# Altium PCB 23970修改.PcbDoc (part 2 of 2)
Units mm, origin at the board's own origin, x right, y up, seen from the top; angles counter-clockwise.
Board outline 62.06 x 76 mm, 2 copper layers (Top Layer, Bottom Layer); 25 components, 55 nets, 531 pads, 222 vias.
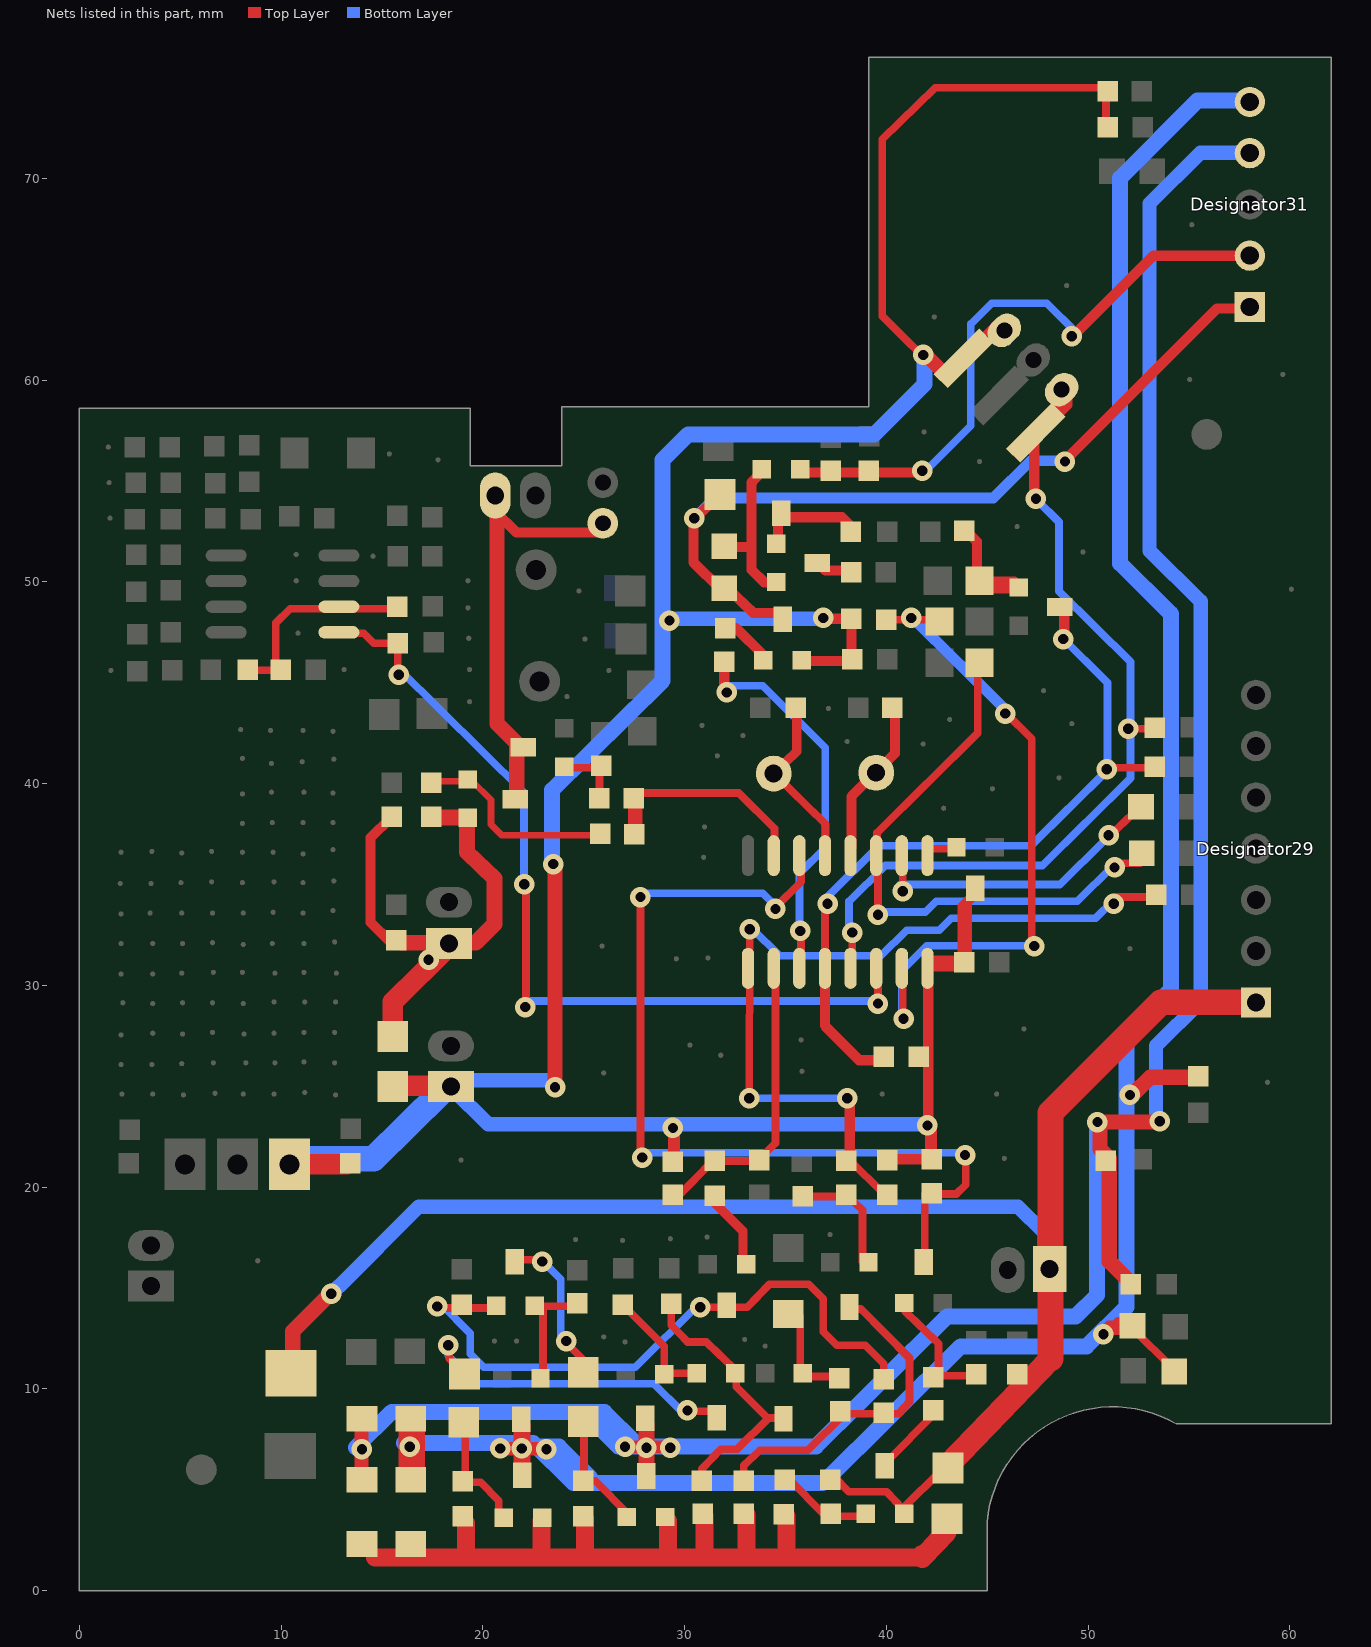
[diagram p2: the nets of this part, all layers, seen from the top]

## Via types
v1: diameter 1.016, hole 0.508, Top Layer to Bottom Layer, 218 vias
v2: diameter 3, hole 3, Top Layer to Bottom Layer, 4 vias

## Nets (pads, with @x,y where several pads share a name; then routed paths per layer and width w, separated by ;. In a path a pad name is that pad's centre, name@x,y a point inside that pad or via, vN(x,y) a via of type N, cw(c..) or ccw(c..) an arc to the next point about the centre after c; other vN are vias at no path point) (continued)
NewNet8: ?.77 pad.136 pad.164 pad.165 | length 10.7
  Top Layer w0.381: pad.164@8.086,45.612 9.948,45.612 9.737,45.612 9.737,47.959 10.456,48.672 pad.136@15.748,48.672
NewNet9: ?.3 ?.78 pad.0@15.833,45.403 pad.0@22.056,35.008 pad.0@22.098,28.93 pad.0@39.582,29.098 pad.133 | length 42.1
  Top Layer w0.381: ?.78@13.039,47.456 14.097,47.456 14.605,46.953 pad.133@15.79,46.953 pad.0@15.79,45.486 ; pad.0@22.14,29.014 v1@22.14,34.84 ; v1(39.582,29.098) ?.3@39.582,30.607
  Bottom Layer w0.381: v1@15.843,45.686 22.045,39.545 pad.0@22.045,35.092 ; v1@22.31,29.224 v1@39.497,29.224
  other v1: 22.098,28.93 22.056,35.008 15.833,45.403
NewNet10: ?.68 pad.198 pad.258 | length 6.7
  Top Layer w0.508: pad.198@43.73,52.444 44.027,52.444 44.492,51.983 44.492,50.013 44.916,50.013 46.355,50.013 46.355,49.678 pad.258@44.746,49.678
NewNet11: ?.5 ?.70 pad.0@37.084,34.044 pad.0@48.768,47.163 pad.0@50.927,40.708 pad.88 pad.100 | length 37.2
  Top Layer w0.381: ?.5@36.957,31.403 v1@36.957,34.086 ; pad.0@50.885,40.792 pad.88@53.298,40.792
  Top Layer w0.508: ?.5@36.957,30.607 36.957,28.008 38.65,26.29 pad.100@39.836,26.29 ; pad.0@48.81,47.247 ?.70@48.81,48.714
  Bottom Layer w0.381: pad.0@37.01,34.033 37.01,34.327 39.635,36.926 47.17,36.926 50.959,40.677 50.959,45.004 v1@48.609,47.331
  other v1: 37.084,34.044 50.927,40.708 48.768,47.163
NewNet12: ?.65 pad.208 | length 2.5
  Top Layer w0.508: pad.208@31.962,47.708 32.554,47.708 ?.65@33.909,46.367
NewNet13: ?.1 ?.52 ?.66 pad.0@23.58,24.949 pad.0@23.495,36.014 pad.0@29.252,48.085 pad.0@29.422,22.937 pad.0@36.872,48.211 pad.0@41.825,61.246 pad.0@42.037,23.062 pad.83 pad.84 pad.97 pad.99 pad.101 pad.111 pad.126 pad.183 pad.190 pad.191 pad.241 pad.263 pad.285 pad.291 pad.296 | length 165.3
  Top Layer w0.381: pad.111@29.379,21.218 29.379,22.853 29.591,22.853 pad.111@29.591,21.512 ; v1@41.868,61.54 43.011,60.408 42.799,60.198 39.793,63.174 39.793,71.934 42.418,74.491 50.885,74.491 pad.83@50.885,72.353
  Top Layer w0.508: ?.66@35.983,46.073 38.269,46.073 pad.191@38.269,48.169 pad.0@36.872,48.169 ; pad.101@40.005,21.386 pad.97@42.164,21.386 ; v1@42.079,23.188 42.079,31.236 43.476,31.236 43.476,30.942 ?.1@42.164,30.942 ; pad.97@42.164,21.595 42.164,23.02 42.249,23.02 pad.97@42.249,21.428 ; pad.263@43.942,61.12 45.635,62.797 45.762,62.671 45.424,62.671 pad.263@44.45,61.707 ; 43.984,33.918 43.984,31.11 43.773,31.11 43.773,33.918 ?.52@44.281,34.421
  Top Layer w0.762: pad.0@23.58,25.074 v1@23.58,35.804
  Top Layer w1.016: pad.291@10.245,21.134 pad.126@13.25,21.134 ; pad.241@15.706,25.032 pad.285@18.457,25.032
  Bottom Layer w0.711: pad.285@18.489,24.875 20.267,23.115 v1@41.889,23.115 ; pad.285@18.881,25.305 v1@23.537,25.305 ; v1@29.146,48.179 pad.0@36.851,48.179
  Bottom Layer w0.787: pad.0@23.431,35.993 23.431,39.681 28.914,45.109 28.914,56.049 30.184,57.306 39.399,57.306 41.89,59.797 pad.0@41.89,61.182
  Bottom Layer w1.27: pad.291@10.456,21.407 14.584,21.407 pad.285@17.949,24.739
  other v1: 29.422,22.937 42.037,23.062 23.58,24.949 23.495,36.014 29.252,48.085 36.872,48.211 41.825,61.246
NewNet14: ?.67 Designator31.1 pad.0@30.48,53.157 pad.0@48.853,55.965 pad.222 pad.247 | length 40.5
  Top Layer w0.508: pad.247@31.327,53.911 30.438,53.073 30.438,50.977 31.792,49.636 32.173,49.636 33.401,48.462 ?.67@34.84,48.462 ; pad.0@48.895,56.049 56.398,63.551 Designator31.1@58.013,63.551
  Bottom Layer w0.533: pad.0@30.554,53.23 31.496,54.163 45.297,54.163 47.159,56.007 pad.0@48.958,56.007
  other v1: 30.48,53.157 48.853,55.965
NewNet15: ?.62 pad.203 pad.209 | length 3.2
  Top Layer w0.381: ?.62@24.045,40.792 25.781,40.792 pad.209@25.781,39.325
NewNet16: ?.55 ?.64 pad.290 pad.297 | length 20.6
  Top Layer w0.508: pad.290@20.574,53.534 21.675,52.444 25.569,52.444 pad.297@25.993,52.863
  Top Layer w0.762: pad.290@20.701,53.66 20.701,42.972 21.675,42.008 ?.55@21.675,39.535
NewNet17: ?.58 ?.59 pad.195 | length 5
  Top Layer w0.508: ?.59@34.629,52.067 34.629,53.199 37.804,53.199 pad.195@38.312,52.696
NewNet18: ?.57 ?.60 pad.221 | length 7.7
  Top Layer w0.508: pad.221@32.004,51.732 33.274,51.732 ; ?.57@33.782,55.42 33.316,54.917 33.316,50.6 33.951,49.971 ?.60@34.459,49.971
NewNet19: ?.61 pad.193 | length 1.6
  Top Layer w0.508: ?.61@36.788,50.768 36.999,50.558 pad.193@38.312,50.558
NewNet20: ?.56 Designator31.2 pad.0@41.783,55.504 pad.0@49.191,62.168 pad.199 pad.202 | length 30.6
  Top Layer w0.508: ?.56@35.772,55.42 pad.0@41.825,55.42 ; v1@49.361,62.294 53.234,66.167 Designator31.2@58.013,66.167
  Bottom Layer w0.381: v1@42.069,55.64 44.185,57.736 44.185,62.776 45.233,63.813 47.942,63.813 v1@49.424,62.346
  other v1: 41.783,55.504 49.191,62.168
NewNet21: ?.53 pad.130 pad.210 | length 9.7
  Top Layer w0.33: pad.130@17.526,40.121 19.473,40.121 20.405,39.199 20.405,37.984 20.955,37.439 pad.210@25.442,37.439
NewNet22: ?.54 pad.0@17.314,31.278 pad.127 pad.129 pad.132 pad.242 pad.286 | length 25.5
  Top Layer w0.508: pad.132@15.452,38.319 14.436,37.313 14.436,33.122 15.409,32.158 pad.127@15.833,32.158
  Top Layer w0.787: pad.127@15.96,32.116 19.643,32.116 20.574,33.038 20.574,35.301 19.219,36.601 19.219,38.319 pad.129@17.441,38.319
  Top Layer w1.016: pad.242@15.536,27.631 15.536,29.182 pad.286@18.33,31.948
  other v1: 17.314,31.278
NewNet23: ?.16 ?.51 | length 1.4
  Top Layer w0.381: ?.16@42.164,36.768 ?.51@43.519,36.768
NewNet24: ?.47 pad.177 pad.249 | length 4.7
  Top Layer w0.381: pad.249@35.729,13.59 35.729,10.698 35.814,10.614 pad.177@37.55,10.614
NewNet25: ?.44 ?.49 pad.114 pad.167 | length 13.4
  Top Layer w0.381: pad.114@29.337,14.009 29.337,13.171 30.141,12.332 31.073,12.332 32.554,10.907 32.554,10.111 34.078,8.602 ; pad.167@30.861,5.542 30.861,6.045 31.792,7.009 32.597,7.009 34.163,8.56 ?.49@34.798,8.56
NewNet26: ?.41 ?.45 pad.116 | length 5.8
  Top Layer w0.381: pad.116@27.051,14.051 28.998,12.123 28.998,10.782 ?.45@30.692,10.782
NewNet27: ?.46 pad.0@18.288,12.165 pad.0@30.141,8.937 pad.232 | length 16.3
  Top Layer w0.381: pad.0@18.33,12.249 18.33,11.494 pad.232@18.881,10.949 ; pad.0@30.099,8.895 ?.46@31.496,8.895
  Bottom Layer w0.381: pad.0@18.288,12.278 18.288,11.655 19.685,10.258 28.469,10.258 v1@29.909,8.833
  other v1: 30.141,8.937 18.288,12.165
NewNet28: ?.22 ?.43 Designator31.4 pad.0@14.012,7.009 pad.0@27.051,7.135 pad.0@28.109,7.093 pad.0@29.295,7.093 pad.0@50.461,23.23 pad.0@53.552,23.272 pad.94 pad.95 pad.235 pad.238 | length 136
  Top Layer w0.381: pad.235@13.843,5.416 13.843,8.392 14.139,8.392 pad.235@14.139,5.416 ; ?.43@27.898,8.56 27.898,6.129 28.321,5.71 ?.43@28.321,8.267 ; ?.22@28.109,5.836 ?.43@28.109,8.057 ; v1@29.083,7.261 27.347,7.261 27.347,7.009 pad.0@29.252,7.009
  Top Layer w0.762: pad.95@51.985,15.392 51.054,16.314 51.054,21.428 50.885,21.595 50.588,21.889 50.588,23.23 pad.0@53.594,23.23
  Bottom Layer w0.711: v1@53.361,23.22 53.361,27.002 55.573,29.192 55.573,49.039 53.044,51.543 53.044,68.749 55.567,71.272 Designator31.4@57.796,71.272
  Bottom Layer w0.787: v1@13.716,7.104 15.494,8.864 24.987,8.864 26.712,7.156 36.512,7.156 43.021,13.6 49.382,13.6 50.44,14.648 pad.0@50.44,23.303 ; 24.85,8.853 26.024,8.853 27.601,7.292
  other v1: 14.012,7.009 28.109,7.093 29.295,7.093 27.051,7.135 50.461,23.23 53.552,23.272
NewNet29: ?.36 ?.38 pad.117 | length 5.1
  Top Layer w0.381: ?.38@22.987,10.698 22.987,14.093 pad.117@24.68,14.093
NewNet30: ?.19 ?.40 Designator31.5 pad.0@16.383,7.135 pad.0@20.87,7.051 pad.0@21.929,7.051 pad.0@23.156,7.009 pad.0@50.758,12.71 pad.0@52.07,24.571 pad.92 pad.217 pad.219 pad.234 pad.237 | length 143.1
  Top Layer w0.381: pad.234@16.298,5.752 pad.237@16.298,8.057 ; pad.234@16.637,5.752 16.637,8.267 16.002,8.267 16.002,5.752 16.933,5.752 pad.237@16.933,8.183 ; ?.19@21.717,5.878 21.717,8.225 22.183,8.225 ?.19@22.183,6.213 ; ?.19@21.971,5.919 ?.40@21.971,8.015 ; v1@23.029,6.884 20.87,6.884 20.87,7.177 v1@23.156,7.177 ; pad.0@50.715,12.626 51.477,13.38 52.028,12.835 52.028,13.213 51.012,13.213 50.8,13.003 50.927,12.877 pad.217@52.155,12.877 ; pad.217@52.409,12.793 pad.219@54.017,11.201
  Top Layer w0.762: v1@52.282,24.655 53.086,25.451 pad.92@55.372,25.451
  Bottom Layer w0.787: v1@16.087,7.313 22.5,7.313 24.5,5.333 36.841,5.333 43.688,12.112 49.922,12.112 51.901,14.072 51.901,27.621 54.113,29.811 54.113,48.41 54.017,48.504 51.583,50.914 51.583,70.017 55.43,73.863 Designator31.5@58.013,73.863 ; 22.648,7.145 23.77,7.145 25.315,5.616
  other v1: 23.156,7.009 20.87,7.051 21.929,7.051 16.383,7.135 50.758,12.71 52.07,24.571
NewNet31: ?.34 ?.35 pad.0@17.738,14.093 pad.0@30.776,14.051 pad.123 pad.175 | length 31.4
  Top Layer w0.381: v1@17.949,14.009 ?.35@20.616,14.009 ; v1@30.946,14.051 33.105,14.051 34.205,15.183 36.153,15.183 36.872,14.47 36.872,12.835 37.55,12.165 38.947,12.165 39.878,11.243 pad.175@39.878,10.572
  Bottom Layer w0.381: pad.0@17.674,14.198 17.933,14.198 19.38,12.751 19.38,11.75 20.055,11.075 27.548,11.075 v1@30.649,14.145
  other v1: 30.776,14.051 17.738,14.093
NewNet32: ?.37 pad.0@22.945,16.314 pad.0@24.13,12.374 pad.230 | length 7.3
  Top Layer w0.381: ?.37@21.59,16.398 v1@22.775,16.398 ; pad.0@24.088,12.332 24.977,11.452 pad.230@24.977,10.823
  Bottom Layer w0.381: v1@22.786,16.513 23.865,15.444 v1@23.865,12.71
  other v1: 24.13,12.374 22.945,16.314
NewNet33: ?.32 pad.110 | length 3.8
  Top Layer w0.457: pad.110@31.538,19.458 31.538,19.164 32.893,17.823 ?.32@32.893,16.272
NewNet34: ?.29 pad.104 pad.106 | length 5.6
  Top Layer w0.381: pad.106@36.068,19.542 38.1,19.542 38.82,18.871 ?.29@38.82,16.314
NewNet35: ?.31 pad.169 pad.176 pad.178 | length 16.6
  Top Layer w0.381: pad.169@32.935,5.291 32.935,6.213 33.74,6.967 36.11,6.967 37.931,8.77 40.598,8.77 41.148,9.356 41.148,11.536 38.735,13.967 ?.31@38.185,13.967
NewNet36: ?.26 pad.179 pad.181 | length 6
  Top Layer w0.381: ?.26@40.936,14.135 40.936,13.841 42.587,12.249 42.587,10.656 pad.181@44.365,10.656
NewNet37: ?.11 ?.28 pad.0@27.813,34.379 pad.0@27.898,21.47 pad.0@34.502,33.792 pad.0@43.9,21.595 pad.98 | length 45.9
  Top Layer w0.381: pad.0@27.813,21.47 pad.0@27.813,34.337 ; pad.0@34.459,33.834 35.772,35.134 ?.11@35.772,36.475 ; ?.28@41.91,16.314 41.91,19.667 43.476,19.667 43.942,20.128 pad.0@43.942,21.595
  Bottom Layer w0.381: v1@27.824,34.568 33.867,34.568 v1@34.502,33.939 ; v1@27.982,21.7 pad.0@43.857,21.7
  other v1: 27.898,21.47 43.9,21.595 34.502,33.792 27.813,34.379
NewNet38: ?.23 pad.171 pad.174 | length 4.5
  Top Layer w0.381: pad.171@35.094,5.626 36.999,3.698 ?.23@38.82,3.698
NewNet39: ?.24 Designator29.1 pad.0@12.488,14.721 pad.173 pad.182 pad.227 pad.260 pad.287 | length 83
  Top Layer w0.381: pad.173@37.38,5.668 38.142,4.914 40.005,4.914 40.809,4.075 pad.227@42.757,6.003
  Top Layer w0.762: pad.260@10.583,11.117 10.583,12.869 12.352,14.638 pad.0@12.573,14.638
  Top Layer w1.143: pad.227@43.011,6.171 48.133,11.494
  Top Layer w1.27: 48.133,11.494 48.133,23.691 53.601,29.159 Designator29.1@58.318,29.159
  Bottom Layer w0.711: v1(12.488,14.721) 12.855,15.088 12.878,15.088 16.829,19.039 46.524,19.039 47.837,17.739 pad.287@47.837,15.748
NewNet40: ?.25 pad.180 | length 3.5
  Top Layer w0.381: ?.25@39.963,6.339 pad.180@42.418,8.812
NewNet41: ?.20 pad.119 pad.229 | length 5.9
  Top Layer w0.381: pad.229@25.019,8.225 25.019,5.458 25.569,5.458 27.178,3.824 ?.20@27.178,3.572
NewNet42: ?.18 ?.21 pad.120 pad.121 pad.168 pad.170 pad.172 pad.228 pad.233 pad.236 | length 40.4
  Top Layer w0.889: 14.647,1.644 41.783,1.644 ; 19.177,1.854 pad.121@19.177,3.363 ; 22.902,1.98 ?.18@22.902,3.488 ; 25.061,1.896 pad.120@25.061,3.572 ; 29.168,2.063 ?.21@29.168,3.447 ; 30.988,2.147 pad.168@30.988,3.74 ; 33.062,2.105 pad.170@33.062,3.782 ; 35.052,2.231 pad.172@35.052,3.698
  Top Layer w1.016: 41.783,1.77 41.783,1.644 42.968,2.902 pad.228@42.968,3.53
NewNet43: ?.17 pad.122 pad.231 | length 5.7
  Top Layer w0.381: pad.122@19.05,5.375 19.897,5.375 20.786,4.452 ?.17@20.786,3.405 ; pad.122@19.135,5.584 pad.231@19.135,8.099
NewNet44: ?.2 pad.0@40.852,28.344 pad.0@41.233,48.211 pad.0@45.889,43.475 pad.0@47.329,31.948 pad.192 pad.254 | length 32.5
  Top Layer w0.381: pad.192@40.174,48.127 pad.254@42.376,48.127 ; pad.0@40.809,28.302 ?.2@40.809,30.565 ; pad.0@45.932,43.475 47.202,42.217 v1@47.202,32.032
  Bottom Layer w0.381: pad.0@40.756,28.333 40.756,30.722 42.005,31.959 pad.0@47.233,31.959
  Bottom Layer w0.533: pad.0@41.275,48.253 v1@45.995,43.579
  other v1: 40.852,28.344 47.329,31.948 45.889,43.475 41.233,48.211
NewNet45: ?.4 pad.0@38.312,32.619 pad.0@47.413,54.121 pad.0@51.985,42.72 pad.87 pad.261 pad.294 | length 43.5
  Top Layer w0.381: ?.4@38.312,31.068 pad.0@38.312,32.703 ; v1(51.985,42.72) pad.87@53.425,42.72
  Top Layer w0.508: v1@47.329,54.247 47.329,57.139 48.048,57.851 48.98,58.773 48.98,59.192 pad.294@48.768,59.402 ; 48.472,58.606 pad.294@48.472,59.318
  Bottom Layer w0.381: v1@38.153,32.545 38.153,34.17 39.941,35.941 47.72,35.941 52.102,40.279 52.102,46.031 48.556,49.542 48.556,52.968 pad.0@47.456,54.058
  other v1: 38.312,32.619 47.413,54.121
NewNet46: ?.6 pad.0@32.089,44.522 pad.0@35.729,32.703 pad.207 | length 18.7
  Top Layer w0.381: ?.6@35.772,30.775 pad.0@35.772,32.619
  Top Layer w0.533: v1@31.962,44.649 pad.207@31.962,46.031
  Bottom Layer w0.381: v1@32.216,44.847 33.867,44.847 36.968,41.777 36.968,36.831 35.698,35.574 pad.0@35.698,32.807
  other v1: 35.729,32.703 32.089,44.522
NewNet47: ?.7 pad.107 pad.109 pad.112 | length 14.5
  Top Layer w0.381: pad.112@29.633,19.5 31.411,21.302 33.613,21.302 34.502,22.182 ?.7@34.502,30.691
NewNet48: ?.8 pad.0@33.21,24.404 pad.0@33.232,32.786 pad.0@38.058,24.404 pad.0@51.266,34.044 pad.90 pad.102 pad.103 | length 40.5
  Top Layer w0.381: v1(33.21,24.404) v1(33.232,32.786) ; pad.103@38.185,21.344 pad.102@39.836,19.709 ; v1@51.308,34.17 51.477,34.379 pad.90@53.425,34.379
  Top Layer w0.508: pad.103@38.185,21.26 v1@38.185,24.404
  Bottom Layer w0.381: v1(33.21,24.404) pad.0@38.015,24.404 ; v1@33.359,32.807 34.713,31.466 39.73,31.466 41.01,32.734 42.619,32.734 43.222,33.331 50.366,33.331 v1@51.266,34.222
  other v1: 38.058,24.404 51.266,34.044
NewNet49: ?.10 pad.211 pad.212 | length 12.3
  Top Layer w0.381: pad.212@27.39,37.481 27.39,39.074 27.728,39.074 pad.212@27.728,37.481 ; pad.211@27.644,39.535 32.681,39.535 34.459,37.774 ?.10@34.459,36.559
NewNet50: ?.12 pad.186 pad.301 | length 8.4
  Top Layer w0.381: pad.301@34.332,40.583 36.999,37.984 ?.12@36.999,36.852
  Top Layer w0.457: pad.301@34.502,40.583 35.56,41.588 pad.186@35.56,43.642
NewNet51: ?.13 pad.188 pad.302 | length 7.6
  Top Layer w0.508: ?.13@38.269,36.852 38.269,39.367 40.428,41.505 pad.188@40.428,43.6
NewNet52: ?.14 pad.0@39.582,33.499 pad.0@51.308,35.846 pad.215 pad.256 | length 28.3
  Top Layer w0.381: ?.14@39.539,36.768 39.539,37.565 44.535,42.511 pad.256@44.535,45.696 ; pad.0@39.582,33.625 ?.14@39.582,36.559 ; v1@51.435,35.846 51.435,36.056 52.578,36.056 pad.215@52.578,36.307
  Bottom Layer w0.381: v1@39.359,33.635 41.931,33.635 42.471,34.17 49.456,34.17 pad.0@51.213,35.909
  other v1: 39.582,33.499 51.308,35.846
NewNet53: ?.15 pad.0@40.809,34.673 pad.0@51.012,37.439 pad.214 | length 14.7
  Top Layer w0.381: pad.0@40.809,34.798 ?.15@40.809,36.601 ; pad.0@51.012,37.355 pad.214@52.366,38.654
  Bottom Layer w0.381: v1@40.703,34.997 48.599,34.997 v1@50.842,37.219
  other v1: 40.809,34.673 51.012,37.439
NewNet54: 
NewNet55: 
pads on no net: Designator29.3 Designator29.4 Designator29.5 Designator29.6 Designator29.7
copper on no net: | length 172.3
  Top Layer w0.381: 6.731,54.833 4.487,54.833 4.487,56.636 6.943,56.636 ; 8.551,56.719 10.499,56.719 ; 8.636,53.157 8.636,55.001 ; 12.023,53.115 15.748,53.115 ; 39.963,50.558 42.333,50.558 ; 40.132,45.989 42.46,45.989 ; 51.308,70.719 52.705,72.102 ; 52.324,11.117 52.324,10.404 53.171,9.566 55.245,9.566 56.049,10.362 56.049,11.955 54.991,13.003 54.398,13.003 ; 52.451,74.323 53.467,74.323 54.568,73.234 54.568,71.851 53.213,70.509 53.213,70.174 ; 53.89,15.057 53.89,13.38 54.229,13.38 54.229,14.889
  Top Layer w0.457: 33.697,19.416 33.697,18.326 35.052,16.985
  Top Layer w0.508: 14.224,56.342 v1(15.367,56.342) ; 26.342,46.445 26.662,46.126 v1@26.662,45.886 ; 53.213,70.174 54.906,68.497 v1@55.181,67.743 ; 55.033,42.762 55.033,43.014 54.144,43.852 54.144,59.234 v1@55.033,59.989
  Top Layer w0.762: 22.521,54.288 22.708,54.102 23.565,54.959 27.009,54.959 27.686,54.247 27.686,49.678 27.559,49.552 23.749,49.552 22.648,50.642 ; 52.79,21.386 54.441,21.386 55.457,22.392 55.457,23.565 ; 54.906,36.768 57.743,36.768 ; 54.906,38.864 55.158,39.116 58.114,39.116 58.318,39.319 ; 55.033,42.762 56.681,42.762 58.318,44.399 ; 55.16,40.75 57.209,40.75 58.318,41.859 ; 55.203,34.631 55.416,34.417 58.14,34.417 58.318,34.239
  Top Layer w0.813: 25.552,46.06 25.603,46.06 v1@26.264,45.399 ; 26.111,46.872 26.622,46.872 27.105,46.39 ; 27.105,47.16 27.105,45.12 v1(25.061,47.163) ; 27.347,47.163 v1(25.061,47.163) ; 27.534,44.815 25.959,44.815 25.061,45.712 v1(25.061,47.163)
  Top Layer w1.016: 2.582,21.092 5.038,21.092
  Top Layer w1.27: 3.81,14.973 5.122,14.973 7.408,12.71 7.408,8.267 9.059,6.632 9.313,6.632 10.245,6.632 ; 4.826,15.183 6.096,16.44 6.096,18.536 5.376,19.29 5.376,20.883
  Bottom Layer w0.381: v1@15.536,56.583 21.368,50.81 22.384,50.81
  Bottom Layer w0.533: v1@55.118,60.125 v1@55.118,67.45
  Bottom Layer w0.711: v1@25.114,47.315 26.617,47.315 ; v1@26.342,45.801 26.342,47.027 ; 26.448,49.982 23.664,49.982 23.506,50.139 23.135,50.506 22.924,50.506 22.924,54.068 22.648,54.068 22.648,50.956 24.014,49.605 26.479,49.605
  other v1: 26.247,45.612 24.765,49.552 55.033,60.031 55.139,67.701
  other v2: 4.1,3 58.42,19.332 58.124,55.336 44.916,68.602

## Polygon pours and split planes (outlines as drawn)
NewNet6 on Top Layer "Bottom Layer-No Net" (hatched 90Degree grid 0.4 track 0.4, remove dead copper, pour order 6): -5.512,83.414 67.462,83.414 67.462,-9.931 64.465,-12.929 1.372,-12.929 -7.62,-3.937
NewNet6 on Bottom Layer "Bottom Layer-No Net" (hatched 90Degree grid 0.4 track 0.4, remove dead copper, pour order 8): -4.013,-2.261 60.681,-2.261 70.612,7.671 70.612,78.638 62.357,86.893 4.343,86.893 -7.823,74.727

## Keep-outs
Keep-Out Layer:
  lines w0.254: 44.995,3.426 cw(c51.223,2.86) 54.367,8.267 ; 45,3.405 45,0 0,0 0,58.606 19.389,58.606 19.389,55.755 23.918,55.755 23.918,58.689 39.116,58.689 39.116,76 62.061,76 62.061,8.267 54.356,8.267

## Silkscreen, mask and mechanical layers (free items; w line width, h text height)
Top Overlay:
  drawing of 791 lines, arcs and shapes, not listed
  text "J3" at 54.864,74.282 h0.71 r90
  text "R51" at 48.268,73.46 h0.71 r90
  text "R46" at 49.53,71.809 h0.71 r90
  text "D9" at 49.826,69.336 h0.71 r90
  text "R47" at 8.763,58.564 h0.71 r180
  text "R48" at 4.629,58.482 h0.71 r180
  text "R45" at 36.322,58.396 h0.71 r180
  text "U5" at 49.869,57.725 h0.71 r180
  text "Q15" at 33.697,56.216 h0.71 r90
  text "D12" at 16.764,55.504 h0.71 r90
  text "C17" at 1.228,55.252 h0.71 r90
  text "C18" at 30.099,55.211 h0.71 r90
  text "R35" at 17.738,55.127 h0.71 r180
  text "R39" at 12.014,55.045 h0.71 r180
  text "C19" at 40.979,55.001 h0.71 r90
  text "R52" at 44.111,54.75 h0.71 r180
  text "COIL" at 28.025,54.498 h0.71 r90
  text "R36" at 40.513,54.288 h0.71 r180
  text "C16" at 1.228,53.115 h0.71 r90
  text "C11" at 14.055,52.947 h0.71 r90
  text "C21" at 28.236,51.48 h0.71 r90
  text "R34" at 19.262,51.103 h0.71 r90
  text "D10" at 47.71,50.726 h0.71 r90
  text "Q13" at 48.98,50.684 h0.71 r90
  text "R53" at 1.312,50.558 h0.71 r90
  text "R31" at 30.522,49.552 h0.71 r90
  text "R44" at 41.444,49.343 h0.71 r90
  text "Q11" at 33.824,48.694 h0.71 r90
  text "R55" at 1.143,48.504 h0.71 r90
  text "3.0" at 57.345,48.385 h1.52 r90
  text "R29" at 14.732,48.337 h0.71 r90
  text "J1" at 61.256,46.702 h0.71 r90
  text "V" at 56.879,46.157 h3.3 r90
  text "R54" at 1.016,46.073 h0.71 r90
  text "SJ-FCPr010921" at 52.942,45.971 h1.52 r90
  text "R30" at 18.33,45.822 h0.71 r180
  text "R32" at 30.649,45.654 h0.71 r90
  text "U3" at 14.436,45.486 h0.71 r90
  text "R41" at 37.338,45.445 h0.71 r90
  text "D6" at 46.99,45.193 h0.71 r90
  text "R40" at 12.023,44.606 h0.71 r180
  text "R43" at 8.721,44.397 h0.71 r180
  text "C23" at 4.36,44.313 h0.71 r180
  text "R28" at 25.781,43.768 h0.71 r90
  text "C27" at 20.701,43.265 h0.71 r90
  text "C22" at 30.184,42.972 h0.71 r90
  text "C6" at 42.181,42.923 h0.71 r90
  text "D7" at 44.924,42.928 h0.71 r90
  text "C5" at 32.258,42.762 h0.71 r90
  text "R21" at 50.758,42.678 h0.71 r90
  text "Y1" at 43.519,41.002 h0.71 r90
  text "R20" at 52.112,40.289 h0.71 r90
  text "C26" at 14.309,40.121 h0.71 r90
  text "C14" at 29.718,39.283 h0.71 r90
  text "R16" at 50.436,38.452 h0.71 r90
  text "U4" at 44.492,37.858 h0.71 r90
  text "Q17" at 23.664,37.439 h0.71 r90
  text "Q16" at 24.85,37.439 h0.71 r90
  text "R42" at 16.171,36.978 h0.71 r180
  text "C29" at 29.379,36.517 h0.71 r90
  text "R17" at 50.34,35.608 h0.71 r90
  text "R14" at 50.588,33.122 h0.71 r90
  text "C13" at 14.52,31.781 h0.71 r90
  text "C9" at 22.31,31.445 h0.71 r90
  text "C8" at 48.875,30.897 h0.71 r180
  text "U2" at 38.058,28.134 h0.71 r90
  text "R27" at 14.012,26.793 h0.71 r90
  text "R28" at 43.392,25.787 h0.71 r90
  text "C20" at 53.89,25.032 h0.71 r90
  text "U1" at 14.139,24.655 h0.71 r90
  text "C3" at 21.759,23.901 h0.71 r90
  text "R18" at 29.21,23.775 h0.71 r90
  text "R15" at 31.327,23.733 h0.71 r90
  text "R4" at 43.349,22.895 h0.71 r90
  text "R5" at 35.772,22.769 h0.71 r90
  text "R2" at 38.058,22.727 h0.71 r90
  text "R9" at 33.951,22.601 h0.71 r90
  text "R8" at 40.301,22.601 h0.71 r90
  text "C24" at 1.228,21.051 h0.71 r90
  text "C25" at 15.409,20.967 h0.71 r90
  text "C10" at 48.937,18.997 h0.71 r90
  text "R19" at 26.882,18.578 h0.71 r90
  text "R24" at 24.68,18.494 h0.71 r90
  text "R50" at 50.969,18.158 h0.71 r90
  text "C12" at 19.262,17.823 h0.71 r90
  text "Q9" at 22.31,17.823 h0.71 r90
  text "C7" at 28.49,17.278 h0.71 r90
  text "Q5" at 32.766,17.111 h0.71 r90
  text "R49" at 55.668,14.973 h0.71 r90
  text "C9" at 7.535,14.428 h0.71 r90
  text "D2" at 14.139,13.967 h0.71 r90
  text "D4" at 16.002,13.841 h0.71 r90
  text "D11" at 56.473,12.751 h0.71 r90
  text "Q1" at 41.19,12.5 h0.71 r90
  text "Q3" at 39.539,12.249 h0.71 r90
  text "D1" at 37.169,11.997 h0.71 r90
  text "Q12" at 23.283,11.578 h0.71 r90
  text "C2" at 2.455,11.494 h0.71 r90
  text "C1" at 48.218,10.488 h0.71 r90
  text "D13" at 7.916,10.32 h0.71 r90
  text "D8" at 56.473,10.027 h0.71 r90
  text "R1" at 45.127,8.979 h0.71 r90
  text "R6" at 43.942,8.392 h0.71 r90
  text "R32" at 19.727,7.177 h0.71 r180
  text "R25" at 26.027,7.089 h0.71 r180
  text "Q7" at 32.935,7.009 h0.71 r90
  text "Q4" at 36.407,6.842 h0.71 r90
  text "Q8" at 30.861,6.8 h0.71 r90
  text "R3" at 41.36,6.758 h0.71 r90
  text "R11" at 38.65,6.422 h0.71 r90
  text "Q2" at 39.158,1.644 h0.71 r90
  text "Q6" at 27.686,1.477 h0.71 r90
  text "D3" at 12.361,1.435 h0.71 r90
  text "R7" at 41.444,1.435 h0.71 r90
  text "D5" at 11.049,1.393 h0.71 r90
  text "C4" at 37.634,1.267 h0.71 r90
  text "R12" at 30.48,1.141 h0.71 r90
  text "R10" at 32.978,1.099 h0.71 r90
  text "Q10" at 22.013,0.932 h0.71 r90
  text "R26" at 25.188,0.387 h0.71 r90
  text "R13" at 35.348,0.387 h0.71 r90
  text "R33" at 19.135,0.345 h0.71 r90
Bottom Overlay:
  lines w0.254: 25.603,48.991 25.612,50.422 cw(c26.654,49.411) 27.665,50.453 27.665,48.976 ; 25.624,48.039 25.633,46.608 ccw(c26.675,47.619) 27.686,46.576 27.686,48.054
  lines w0.508: 21.611,52.727 21.611,55.41 ; 56.557,66.726 60.198,66.726 ; 56.6,64.736 60.156,64.736 ; 56.653,39.891 60.219,39.891 ; 56.663,35.836 59.986,35.836 ; 56.674,37.89 60.177,37.89 ; 56.727,70.635 59.902,70.635 ; 56.737,41.85 60.082,41.85 ; 56.737,68.696 60.071,68.696 ; 56.758,33.813 59.965,33.813 ; 56.843,31.76 60.039,31.76 ; 56.875,72.699 59.838,72.699
  text "JS-FCPr0109021" at 53.044,61.141 h1.52 r90
  text "C28" at 29.159,51.768 h0.94 r90
  text "V" at 57.387,51.056 h3.3 r90
  text "3.0" at 57.311,48.465 h1.52 r90
  text "WB23970" at 11.405,10.004 h1.27 r90
Top Solder:
  region: 12.996,27.128 12.996,43.265 1.863,43.265 1.863,27.128
Bottom Solder:
  region: 13.928,25.41 13.928,56.929 0.974,56.929 0.974,25.41